# Altium PCB RF Reader.PcbDoc
Units mil, origin at the board's own origin, x right, y up, seen from the top; angles counter-clockwise.
Board outline 6000 x 4000 mil, 2 copper layers (Top Layer, Bottom Layer); 20 components, 14 nets, 51 pads, 0 vias.
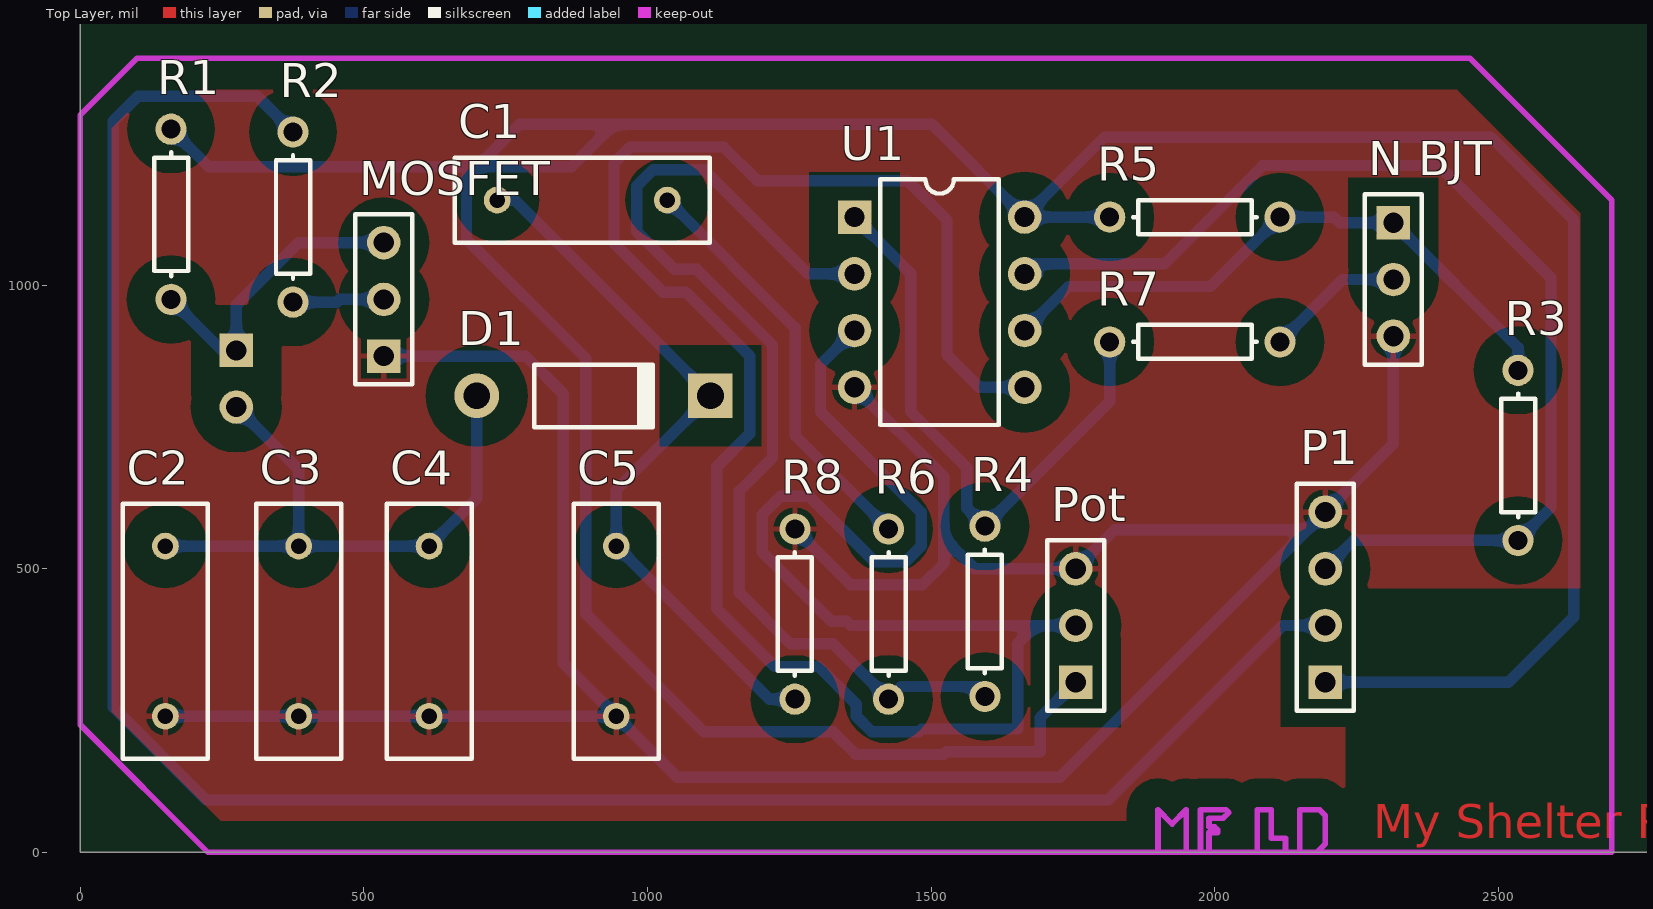
[diagram p0: Top Layer view]
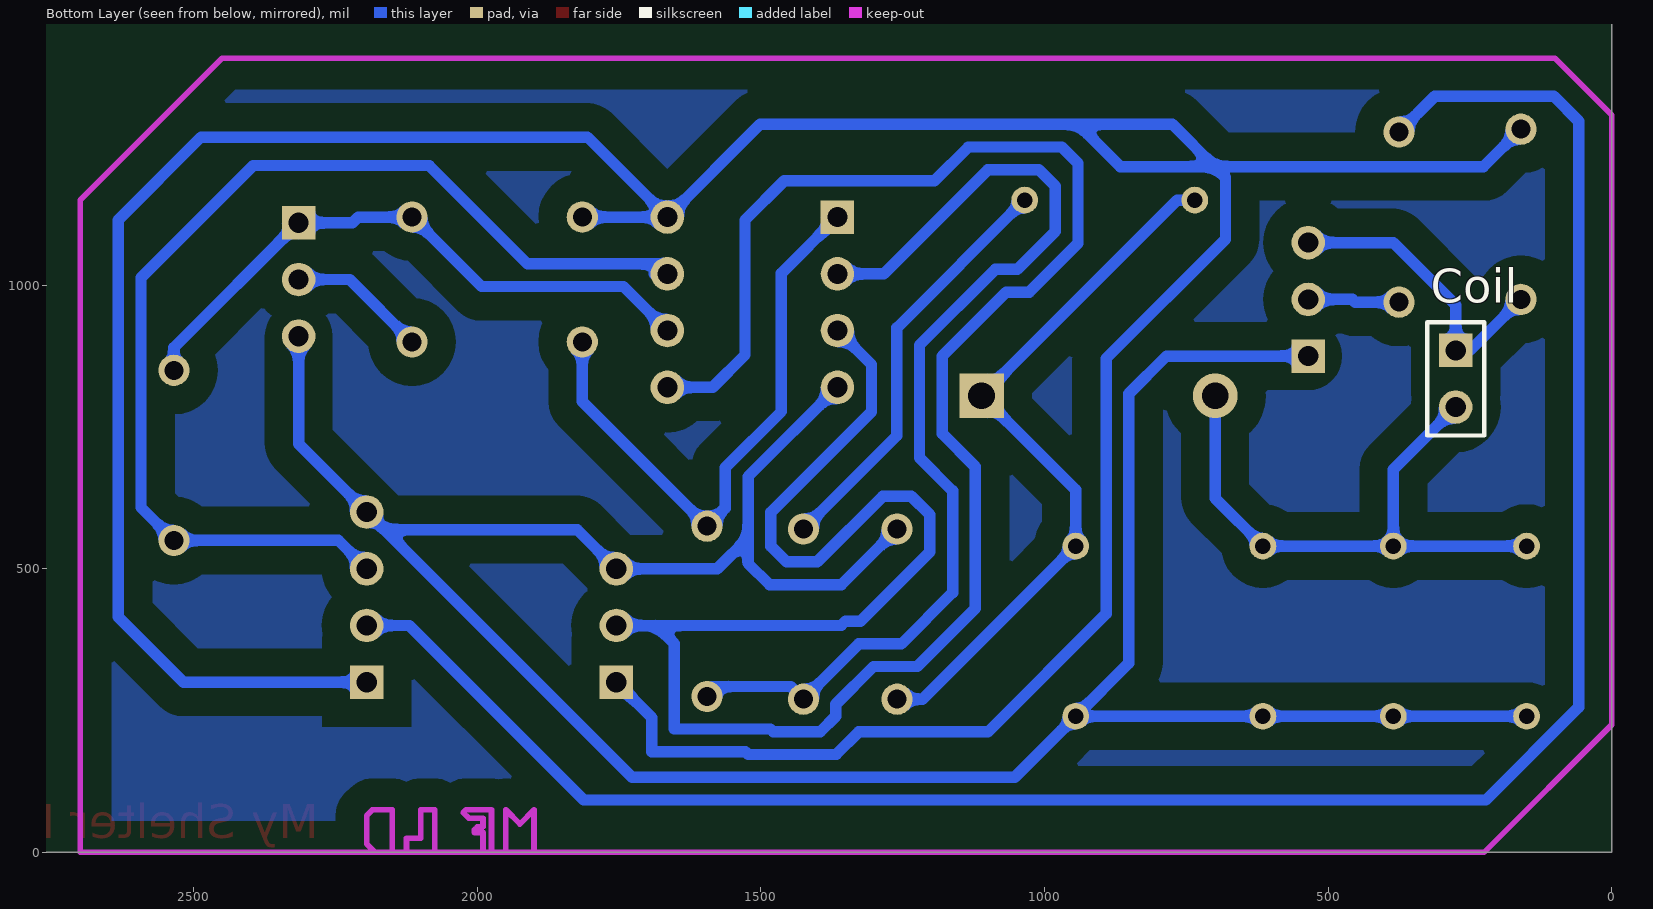
[diagram p1: Bottom Layer view, seen from below]

## Layer stack, top to bottom
Top Solder: solder mask 0.4, Solder Resist, Dk 3.5
Top Layer: signal copper 1.4
Dielectric 1: dielectric 12.6, FR-4, Dk 4.8
Bottom Layer: signal copper 1.4
Bottom Solder: solder mask 0.4, Solder Resist, Dk 3.5

## Board outline
0,0 6000,0 6000,4000 0,4000

## Design rules (kind name [scope] priority, off if disabled: settings)
Clearance "PolyGon Pour Clearance" [InPolyGon] p1: gap=50
Clearance [All] p2: gap=20
PolygonConnect [All] p1: connectstyle=Relief reliefconductorwidth=10 reliefentries=4 polygonreliefangle="90 Angle" airgapwidth=10
RoomDefinition "RFID reader circuit" [InComponentClass('RFID reader circuit')] p1: confinementstyle=ConfineIn formatcopy=TRUE lockcomponents=FALSE outline -2645,-2085 -645,-2085 -645,-1085 -2645,-1085
RoutingLayers [All] p1: top layer_v5=FALSE bottom layer_v5=TRUE
RoutingVias [All] p1: holewidth=28 width=50 viastyle="Through Hole" minholewidth=28 minwidth=50 maxholewidth=28 maxwidth=50
SolderMaskExpansion [All] p1: expansion=4
Width [All] p1: maxlimit=20 minlimit=20 preferedwidth=20
29 further rules are at their usual default settings.

## Components (designator, comment, footprint, x,y, rotation, side; value= is the part's Value field where it differs from the comment)
C1 "Cap" RAD-0.3 885,1150 r180 top
C2 "Cap" RAD-0.3 150,390 r90 top
C3 "Cap" RAD-0.3 385,390 r90 top
C4 "Cap" RAD-0.3 615,390 r90 top
C5 "Cap" RAD-0.3 945,390 r90 top
Coil "Header 2" HDR1X2 275,885 r270 bottom
D1 "Diode 1N4004" DO-41 905,805 r0 top
MOSFET "Header 3" HDR1X3 535,875 r90 top
"N BJT" "Header 3" HDR1X3 2315,1110 r270 top
P1 "Header 4" HDR1X4 2195,300 r90 top
Pot "Header 3" HDR1X3 1755,300 r90 top
R1 "Res1" AXIAL-0.3 160,1125 r90 top
R2 "Res1" AXIAL-0.3 375,1120 r90 top
R3 "Res1" AXIAL-0.3 2535,700 r90 top
R4 "Res1" AXIAL-0.3 1595,425 r90 top
R5 "Res1" AXIAL-0.3 1965,1120 r180 top
R6 "Res1" AXIAL-0.3 1425,420 r270 top
R7 "Res1" AXIAL-0.3 1965,900 r0 top
R8 "Res1" AXIAL-0.3 1260,420 r90 top
U1 "LM358P" P008 1515,970 r270 top

## Footprints (in the part's own frame and the unit in brackets; to place one, negate y for a bottom-side part, rotate by r counter-clockwise, add the part's x,y. Pads: shape width x height; smd on the part's side, far side on the other; paste and mask are expansions set on the pad)
AXIAL-0.3 [mm] "Axial Device, Thru-Hole; 2 Leads; 0.3 in Pin Spacing"
  round 1.4 hole 0.85: 1(-3.81,0) 2(3.81,0)
  silkscreen extent -2.77,-0.76 2.77,0.76
DO-41 [mm] "Diode, Axial; Body 5.2 x 2.7 mm (LxDia. max), Lead Dia. 0.86 mm (max)"
  round 2 hole 1.2: 1(-5.23,0)
  rect 2x2 hole 1.2: 2(5.23,0)
  silkscreen extent -2.65,-1.4 2.75,1.4
HDR1X2 [mm] "Connector; Header; 2 Position"
  rect 1.5x1.5 hole 0.9: 1(0,0)
  round 1.5 hole 0.9: 2(2.54,0)
  silkscreen extent -1.27,-1.27 3.81,1.27
HDR1X3 [mm] "Connector; Header; 3 Position"
  rect 1.5x1.5 hole 0.9: 1(0,0)
  round 1.5 hole 0.9: 2(2.54,0) 3(5.08,0)
  silkscreen extent -1.27,-1.27 6.35,1.27
HDR1X4 [mm] "Connector; Header; 4 Position"
  rect 1.5x1.5 hole 0.9: 1(0,0)
  round 1.5 hole 0.9: 2(2.54,0) 3(5.08,0) 4(7.62,0)
  silkscreen extent -1.27,-1.27 8.89,1.27
P008 [mm] "DIP; 8 Leads; Row Spacing 7.62 mm; Pitch 2.54 mm"
  rect 1.5x1.5 hole 0.9: 1(-3.81,-3.81)
  round 1.5 hole 0.9: 2(-1.27,-3.81) 3(1.27,-3.81) 4(3.81,-3.81) 5(3.81,3.81) 6(1.27,3.81) 7(-1.27,3.81) 8(-3.81,3.81)
  silkscreen extent -5.5,-2.65 5.5,2.65
RAD-0.3 [mm] "Radial Cap, Thru-Hole; 2 Leads; 0.3 in Pin Spacing"
  round 1.2 hole 0.7: 1(-3.81,0) 2(3.81,0)
  silkscreen extent -5.71,-1.91 5.71,1.91

## Part data
C1 C2 C3 C4 C5: "Capacitor"
Coil: "Header, 2-Pin"
D1: "1 Amp General Purpose Rectifier"
MOSFET "N BJT" Pot: "Header, 3-Pin"
P1: "Header, 4-Pin"
R1 R2 R3 R4 R5 R6 R7 R8: "Resistor"
U1: "Dual Operational Amplifier"

## Nets (pads, with @x,y where several pads share a name; then routed paths per layer and width w, separated by ;. In a path a pad name is that pad's centre, name@x,y a point inside that pad or via, vN(x,y) a via of type N, cw(c..) or ccw(c..) an arc to the next point about the centre after c; other vN are vias at no path point)
GND: "N BJT.3" C2.1 C3.1 C4.1 C5.1 MOSFET.1 P1.4 Pot.3 R8.2 U1.4 | length 4981.2
  Bottom Layer w20: C2.1 C3.1 C4.1 C5.1 ; MOSFET.1 785,875 851.38,808.62 851.38,333.62 C5.1 ; R8.2 1358,472 1485,472 1522.56,509.56 1522.56,554.44 ; U1.4 1522.56,662.44 1522.56,554.44 ; 2315,910 2315,720 P1.4 2164,569 ; C5.1 1052.56,132.44 1727.44,132.44 2164,569 ; 1522.56,554.44 1577,500 Pot.3 1824,569 2164,569
NetC1_1: C1.1 R6.1 | length 741.5
  Bottom Layer w20: C1.1 1260.28,924.72 1260.28,734.72 R6.1
NetC1_2: C1.2 C5.2 D1.2 R8.1 | length 1279.4
  Bottom Layer w20: C1.2 765.91,1150 D1.2 945,639.09 C5.2 1215,270 R8.1
NetC2_2: C2.2 C3.2 C4.2 Coil.2 D1.1 | length 1055.4
  Bottom Layer w20: C2.2 C3.2 ; Coil.2 385,675 C3.2 ; D1.1 699.09,624.09 C4.2 C3.2
NetCoil_1: Coil.1 MOSFET.3 R1.1 | length 537.8
  Bottom Layer w20: R1.1 250,885 Coil.1 275,965 385,1075 MOSFET.3
NetMOSFET_2: MOSFET.2 R2.1 | length 162.1
  Bottom Layer w20: R2.1 452,970 457,975 MOSFET.2
"NetN BJT_1": "N BJT.1" R3.2 R5.1 U1.6 | length 1088.1
  Bottom Layer w20: U1.6 1742.56,997.56 1992.56,997.56 R5.1 2210,1120 2220,1110 2315,1110 2535,890 R3.2
"NetN BJT_2": "N BJT.2" R7.2 | length 245.6
  Bottom Layer w20: R7.2 2225,1010 2315,1010
NetPot_2: Pot.2 U1.3 U1.5 | length 4317.1
  Bottom Layer w20: U1.3 1305,860 1305,776.99 1482.56,599.43 1482.56,540 1455,512.44 1400.56,512.44 1285,628 1235,628 1202.44,595.44 1202.44,529.56 1324.44,407.56 1351,407.56 1358.56,400 1685,400 ; U1.5 1585,820 1528,877 1528,1115 1459,1184 1193.91,1184 1134.28,1243.62 969.62,1243.62 941,1215 941,1073.8 1027,987.8 1067.48,987.8 1180.28,875 1180.28,738.28 1122,680 1122,430 1224.44,327.56 1301.44,327.56 1368,261 1368,240 1395.56,212.44 1478,212.44 1483,217.44 1652.56,217.44 1652.56,367.56 1685,400 ; Pot.2 1685,400
NetR4_1: R4.1 R6.2 U1.2 | length 1862.1
  Bottom Layer w20: U1.2 1283.52,1020 1099.9,1203.62 1010,1203.62 981,1174.62 981,1094.84 1048.03,1027.8 1086.79,1027.8 1220.28,894.32 1220.28,695.63 1162,637.35 1162,457.98 1252.42,367.56 1327.44,367.56 R6.2 1447.44,292.44 1577.56,292.44 R4.1
NetR4_2: R4.2 R7.1 U1.1 | length 1056.4
  Bottom Layer w20: U1.1 1464,1021 1464,777.57 1563,678.57 1563,607 R4.2 1815,795 R7.1
OUTPUT: P1.3 R3.1 U1.7 | length 1947.2
  Bottom Layer w20: U1.7 1688.43,1020 1688.43,1037.56 1911.56,1037.56 2085,1211 2395,1211 2593,1013 2593,608 R3.1 2245,550 P1.3
SQR: P1.2 R2.2 | length 3726.5
  Bottom Layer w20: R2.2 312,1333 102,1333 58,1289 58,256 221.56,92.44 1812.44,92.44 2120,400 P1.2
VCC: P1.1 Pot.1 R1.2 R5.2 U1.8 | length 6263.3
  Bottom Layer w20: R1.2 226,1209 700,1209 ; Pot.1 1692.56,237.56 1692.56,177.44 1527.56,177.44 1522.56,172.44 1367.44,172.44 1327.44,212.44 1099.56,212.44 891.38,420.62 891.38,870.62 681,1081 681,1190 700,1209 ; R5.2 U1.8 ; P1.1 2518,300 2633,415 2633,1115 2487,1261 1806,1261 U1.8 ; 700,1209 774.62,1283.62 941,1283.62 ; 700,1209 866.38,1209 941,1283.62 ; 941,1283.62 1501.38,1283.62 U1.8

## Polygon pours and split planes (outlines as drawn)
GND on Top Layer "Bottom Layer-No Net" (solid, pour order 12): 225,0 0,225 0,1300 100,1400 105,1395 2455,1395 2700,1150 2690,1140 2690,0 2225,0 225,0
GND on Bottom Layer "Bottom Layer-No Net" (solid, pour order 14): 225,0 0,225 0,1300 100,1400 2450,1400 2700,1150 2700,0 225,0

## Keep-outs
Keep-Out Layer:
  lines w10: 1900,0 1900,75 1925,50 1950,75 1950,0 ; 1975,0 1975,75 2020,75 2025,70 2015,60 1990,60 1990,45 2000,45 2005,40 2005,35 1990,35 1990,0 ; 2075,0 2075,75 2100,75 2100,25 2125,25 2125,0 ; 2150,0 2150,75 2175,75 2185,75 2195,65 2195,15 2180,0 ; 0,225 0,1300 100,1400 2450,1400 2700,1150 2700,0 225,0 0,225

## Other copper
Top Layer:
  text "My Shelter RF Reader" at 2280,25 h60